# Altium PCB Copy of cs301_YourGroupNumber--4 holes.PcbDoc
Units mm, origin at the board's own origin, x right, y up, seen from the top; angles counter-clockwise.
Board outline 87.88 x 127 mm, 2 copper layers (Top Layer, Bottom Layer); 41 components, 17 nets, 144 pads, 0 vias.
Unrouted connection lines stored in the file: 48.
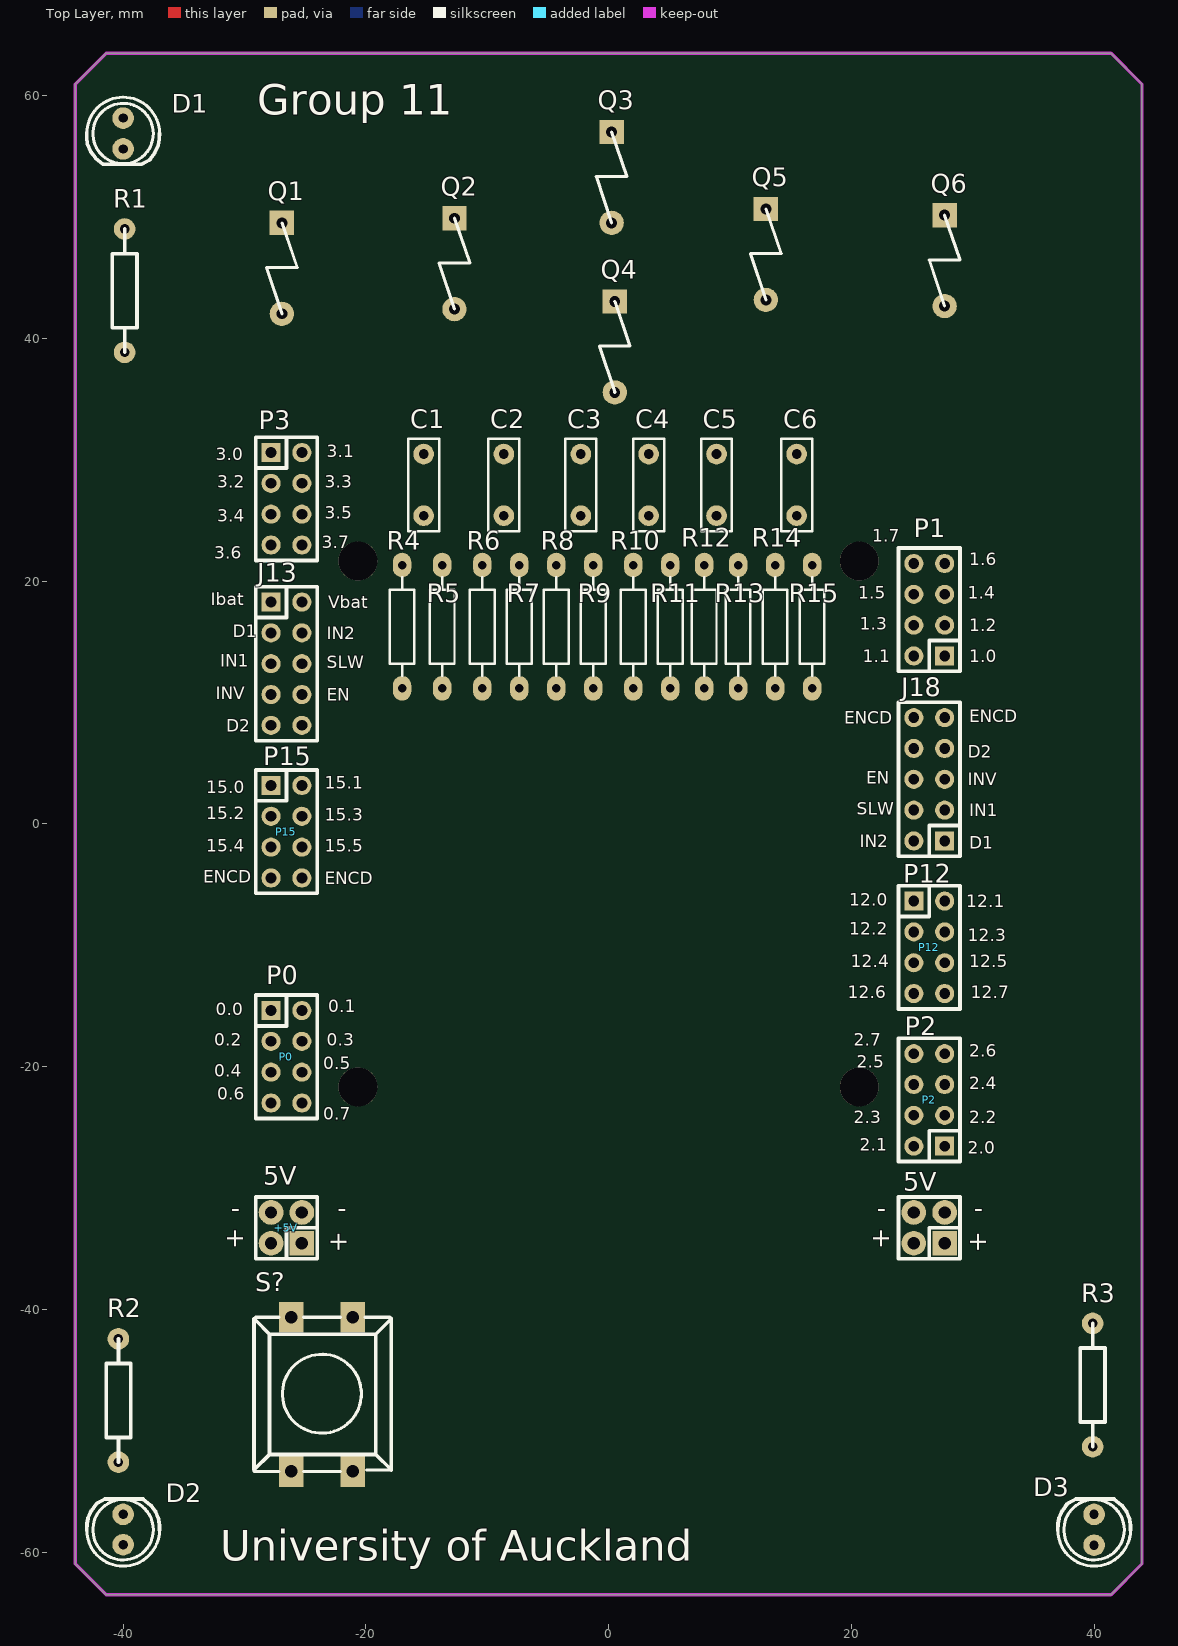
[diagram p0: Top Layer view]
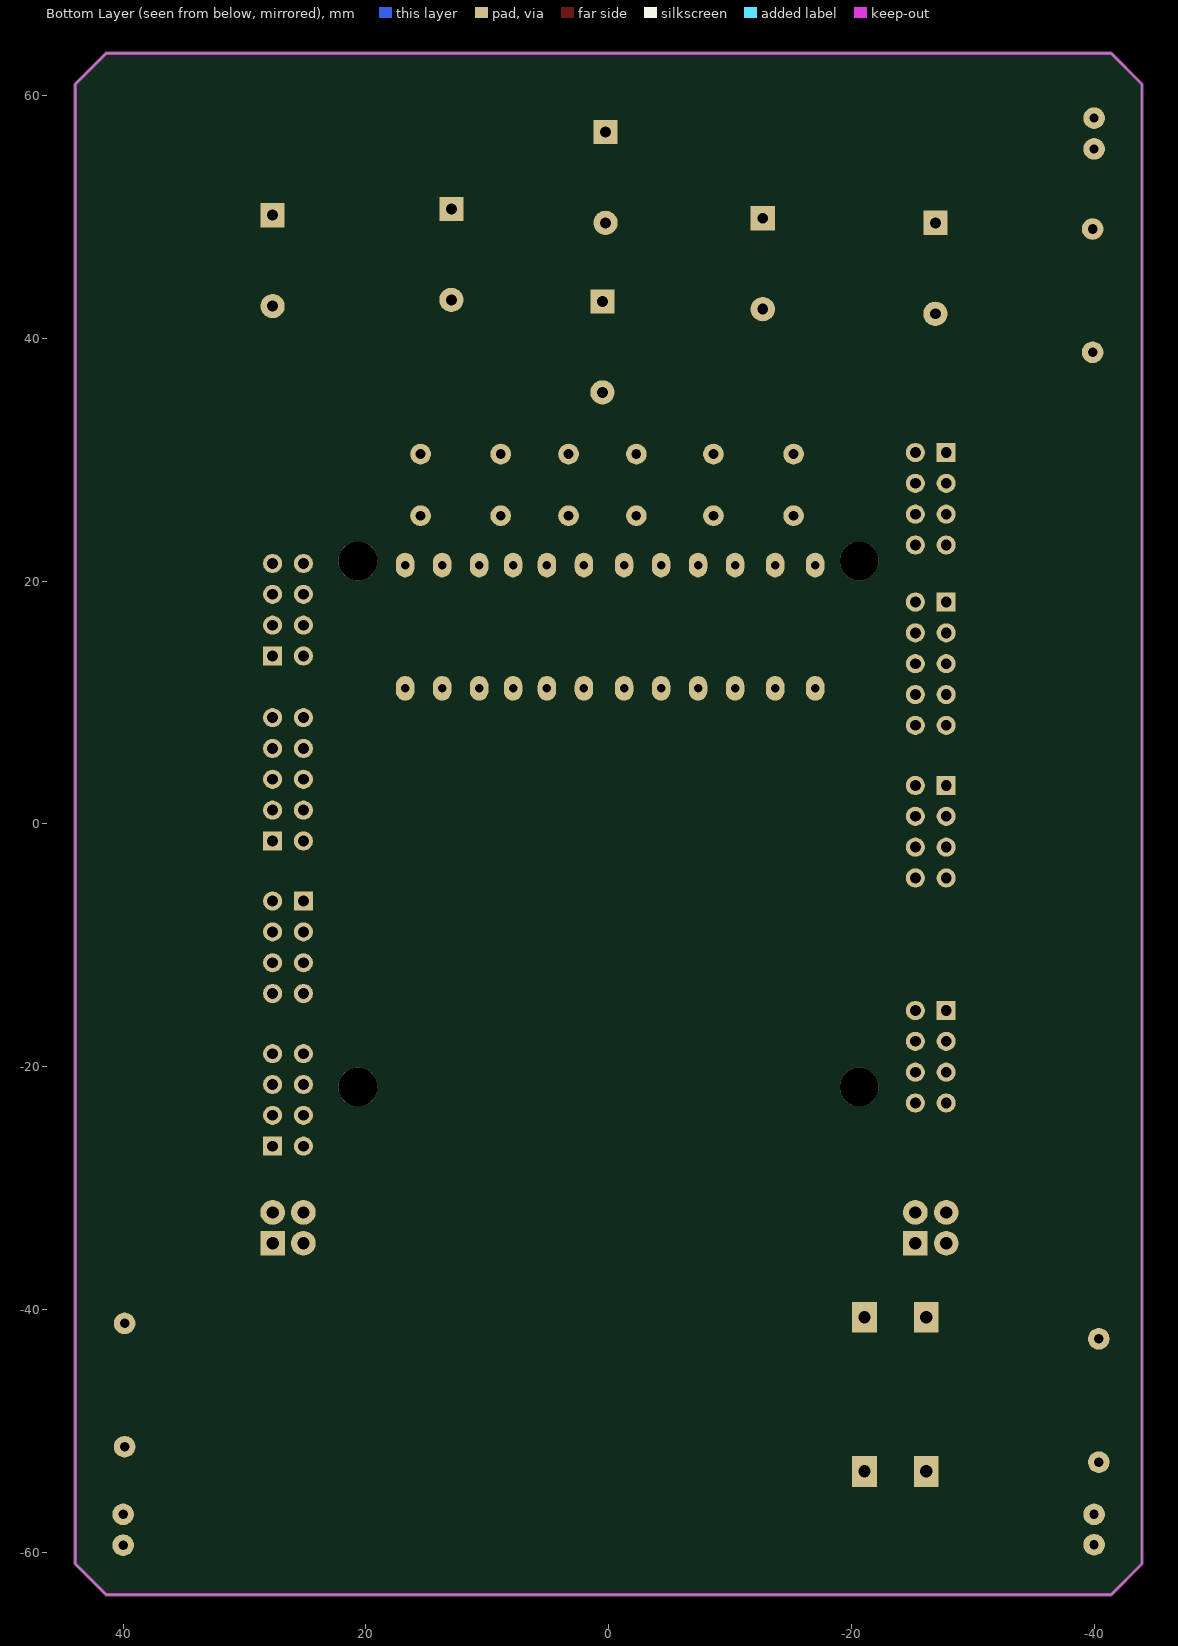
[diagram p1: Bottom Layer view, seen from below]

## Layer stack, top to bottom
Top Solder: solder mask 0.0102, Solder Resist, Dk 3.5
Top Layer: signal copper 0.0356
Dielectric1: dielectric 0.32, FR-4, Dk 4.8
Bottom Layer: signal copper 0.0356
Bottom Solder: solder mask 0.0102, Solder Resist, Dk 3.5

## Board outline
-43.942,-60.96 -41.402,-63.5 41.402,-63.5 43.942,-60.96 43.942,60.96 41.402,63.5 -41.402,63.5 -43.942,60.96

## Design rules (kind name [scope] priority, off if disabled: settings)
Clearance [All] p1: gap=0.254 ignorepadtopadclearanceinfootprint=FALSE except(0: Arc-Hole Track-Hole SMDPad-Hole THPad-Hole Via-Hole Fill-Hole Poly-Hole Region-Hole Text-Hole)
PolygonConnect [All] p1: connectstyle=Relief reliefconductorwidth=0.508 reliefentries=4 polygonreliefangle="90 Angle" airgapwidth=0.254
RoomDefinition cs301_YourGroupNumber--------------- [InComponentClass('cs301_YourGroupNumber---------------')] p1: confinementstyle=ConfineIn formatcopy=TRUE lockcomponents=FALSE outline 171.244,-65.956 182.928,-65.956 182.928,-50.716 171.244,-50.716
RoutingVias [All] p1: holewidth=0.711 width=1.27 viastyle="Through Hole" minholewidth=0.711 minwidth=1.27 maxholewidth=0.711 maxwidth=1.27
SilkToSolderMaskClearance SilkscreenOverComponentPads [IsPad] p1: minsilkscreentomaskgap=0.254 clearancetoexposedcopper=TRUE
SolderMaskExpansion [All] p1: expansion=0.102 istentingtop=FALSE
Width [All] p1: maxlimit=0.762 minlimit=0.254 preferedwidth=0.254 minimp=50.000000 maximp=50.000000 favimp=50.000000
29 further rules are at their usual default settings.

## Components (designator, comment, footprint, x,y, rotation, side; value= is the part's Value field where it differs from the comment)
5V "5V" IDC4 27.686,-34.544 r90 top locked
+5V "5V" IDC4 -25.273,-34.544 r90 top locked
C1 "*" ece-RAD0.2 -15.24,25.4 r90 top
C2 "*" ece-RAD0.2 -8.636,25.4 r90 top
C3 "*" ece-RAD0.2 -2.286,25.4 r90 top
C4 "*" ece-RAD0.2 3.302,25.4 r90 top
C5 "*" ece-RAD0.2 8.89,25.4 r90 top
C6 "*" ece-RAD0.2 15.494,25.4 r90 top
D1 "LED" LED0.1/5MM#1 -40,55.62 r180 top locked
D2 "LED" LED0.1/5MM#2 -40,-56.88 r0 top locked
D3 "LED" LED0.1/5MM#1 40,-56.88 r0 top locked
J13 "CON10" IDC10 -27.813,18.288 r270 top locked
J18 "CON10" IDC10 27.686,-1.397 r90 top locked
P0 "P0" idc8 -27.813,-15.367 r270 top locked
P1 "P1" idc8 27.686,13.843 r90 top locked
P2 "P2" idc8 27.686,-26.543 r90 top locked
P3 "P3" idc8 -27.813,30.607 r270 top locked
P12 "P12" idc8 25.146,-6.35 r270 top locked
P15 "P15" IDC8 -27.813,3.175 r270 top locked
Q1 "VEMT3700" VEMT3700 -30.734,52.07 r270 top
Q2 "VEMT3700" VEMT3700 -16.51,52.451 r270 top
Q3 "VEMT3700" VEMT3700 -3.556,59.563 r270 top
Q4 "VEMT3700" VEMT3700 -3.302,45.593 r270 top
Q5 "VEMT3700" VEMT3700 9.144,53.213 r270 top
Q6 "VEMT3700" VEMT3700 23.876,52.705 r270 top
R1 "RES2" AXIAL0.4 -39.878,49.022 r270 top
R2 "RES2" AXIAL0.4 -40.386,-52.578 r90 top
R3 "RES2" AXIAL0.4 39.878,-41.148 r270 top
R4 "*" ece-AXIAL0.4 -17.018,16.256 r90 top
R5 "*" ece-AXIAL0.4 -13.716,16.256 r270 top
R6 "*" ece-AXIAL0.4 -10.414,16.256 r270 top
R7 "*" ece-AXIAL0.4 -7.366,16.256 r270 top
R8 "*" ece-AXIAL0.4 -4.318,16.256 r270 top
R9 "*" ece-AXIAL0.4 -1.27,16.256 r270 top
R10 "*" ece-AXIAL0.4 2.032,16.256 r270 top
R11 "*" ece-AXIAL0.4 5.08,16.256 r270 top
R12 "*" ece-AXIAL0.4 7.874,16.256 r270 top
R13 "*" ece-AXIAL0.4 10.668,16.256 r270 top
R14 "*" ece-AXIAL0.4 13.716,16.256 r270 top
R15 "*" ece-AXIAL0.4 16.764,16.256 r270 top
S? "SW-PB" SW-PB -26.67,-50.8 r90 top

## Footprints (in the part's own frame and the unit in brackets; to place one, negate y for a bottom-side part, rotate by r counter-clockwise, add the part's x,y. Pads: shape width x height; smd on the part's side, far side on the other; paste and mask are expansions set on the pad)
AXIAL0.4 [mil]
  round 70 hole 31: 1(0,0) 2(400,0)
  silkscreen extent 0,-40 400,40
ece-AXIAL0.4 [mil]
  oval 80x60 hole 27.56: 1(-200,0) 2(200,0)
  silkscreen extent -160,-40 160,40
ece-RAD0.2 [mm]
  round 1.7 hole 0.8: 1(0,0) 2(5.08,0)
  silkscreen extent -1.27,-1.27 6.35,1.27
IDC4 [mil]
  rect 80x80 hole 40: 1(0,0)
  round 80 hole 40: 2(0,100) 3(100,0) 4(100,100)
  silkscreen extent -50,-50 150,150
idc8 [mil]
  rect 62x62 hole 35: 1(0,0)
  round 62 hole 35: 2(0,100) 3(100,0) 4(100,100) 5(200,0) 6(200,100) 7(300,0) 8(300,100)
  silkscreen extent -50,-50 350,150
IDC8 [mil]
  rect 62x62 hole 35: 1(0,0)
  round 62 hole 35: 2(0,100) 3(100,0) 4(100,100) 5(200,0) 6(200,100) 7(300,0) 8(300,100)
  silkscreen extent -50,-50 350,150
IDC10 [mil]
  rect 62x62 hole 35: 1(0,0)
  round 62 hole 35: 2(0,100) 3(100,0) 4(100,100) 5(200,0) 6(200,100) 7(300,0) 8(300,100) 9(400,0) 10(400,100)
  silkscreen extent -50,-50 450,150
LED0.1/5MM#1 [mil]
  round 70 hole 30: A(0,0) K(0,-100)
  silkscreen extent -118,-168 118,50
LED0.1/5MM#2 [mil]
  round 70 hole 30: A(0,0) K(0,-98.43)
  silkscreen extent -118,-168 118,50
SW-PB [mil]
  rect 100x80 hole 40: 1(-100,-20) 1(400,-20) 2(-100,-220) 2(400,-220)
  silkscreen extent -100,-345 400,100
VEMT3700 [mm]
  rect 2x2 hole 0.9: 1(2.54,3.81)
  round 2 hole 0.9: 2(10.033,3.81)
  silkscreen extent 2.54,2.54 10.03,5.08

## Part data
5V +5V: library part CON4, "Connector"
C1 C2 C3 C4 C5 C6: library part CAP, "Capacitor Non Polarised Through Hole"
J13 J18: "Connector"
P0 P1 P2 P3: library part CON8, "Connector"
P12 P15: library part CON8_1, "Connector"
Q1 Q2 Q3 Q4 Q5 Q6: "Silicon NPN Phototransistor"
R4 R5 R6 R7 R8 R9 R10 R11 R12 R13 R14 R15: library part Res1, "Resistor", LatestRevisionDate=17-Jul-2002, LatestRevisionNote="Re-released for DXP Platform.", PackageReference=AXIAL-0.3, Published=8-Jun-2000, Publisher="Altium Limited"
S?: "Push Button Switch"

## Free pads (board coordinates)
  round 3.2 hole 3.2 unplated: 1(-20.65,-21.666) 1(-20.65,21.666) 1(20.65,-21.666) 1(20.65,21.666)

## Nets (pads, with @x,y where several pads share a name; then routed paths per layer and width w, separated by ;. In a path a pad name is that pad's centre, name@x,y a point inside that pad or via, vN(x,y) a via of type N, cw(c..) or ccw(c..) an arc to the next point about the centre after c; other vN are vias at no path point)
+5V: 5V.1 5V.2 +5V.1 +5V.2 R5.2 R7.2 R9.2 R11.2 R13.2 R15.2
GND: 5V.3 5V.4 +5V.3 +5V.4 D1.K D2.K D3.K Q1.1 Q2.1 Q3.1 Q4.1 Q5.1 Q6.1 R4.1 R6.2 R8.2 R10.2 R12.2 R14.2
NetC1_1: C1.1 R4.2 R5.1 | length 0.3
  Top Layer w0.254: R4.2 R4.2@-17.018,21.59
NetC1_2: C1.2 Q1.2
NetC2_1: C2.1 R6.1 R7.1
NetC2_2: C2.2 Q2.2
NetC3_1: C3.1 R8.1 R9.1
NetC3_2: C3.2 Q3.2
NetC4_1: C4.1 R10.1 R11.1
NetC4_2: C4.2 Q4.2
NetC5_1: C5.1 R12.1 R13.1
NetC5_2: C5.2 Q5.2
NetC6_1: C6.1 R14.1 R15.1
NetC6_2: C6.2 Q6.2
NetD1_A: D1.A R1.1
NetD2_A: D2.A R2.1
NetD3_A: D3.A R3.2
pads on no net: J13.1 J13.2 J13.3 J13.4 J13.5 J13.6 J13.7 J13.8 J13.9 J13.10 J18.1 J18.2 J18.3 J18.4 J18.5 J18.6 J18.7 J18.8 J18.9 J18.10 P0.1 P0.2 P0.3 P0.4 P0.5 P0.6 P0.7 P0.8 P1.1 P1.2 P1.3 P1.4 P1.5 P1.6 P1.7 P1.8 P2.1 P2.2 P2.3 P2.4 P2.5 P2.6 P2.7 P2.8 P3.1 P3.2 P3.3 P3.4 P3.5 P3.6 P3.7 P3.8 P12.1 P12.2 P12.3 P12.4 P12.5 P12.6 P12.7 P12.8 P15.1 P15.2 P15.3 P15.4 P15.5 P15.6 P15.7 P15.8 R1.2 R2.2 R3.1 S?.1 S?.2

## Keep-outs
Keep-Out Layer:
  the board outline again, w0.254

## Silkscreen, mask and mechanical layers (free items; w line width, h text height)
Top Overlay:
  text "Group 11" at -28.956,58.42 h2.54
  text "3.1" at -23.241,30.226 h1.02
  text "3.0" at -32.385,29.972 h1.02
  text "3.2" at -32.258,27.686 h1.02
  text "3.3" at -23.368,27.686 h1.02
  text "3.5" at -23.368,25.146 h1.02
  text "3.4" at -32.258,24.892 h1.02
  text "1.7" at 21.717,23.241 h1.02
  text "3.7" at -23.622,22.733 h1.02
  text "3.6" at -32.512,21.844 h1.02
  text "1.6" at 29.718,21.336 h1.02
  text "1.5" at 20.574,18.542 h1.02
  text "1.4" at 29.591,18.542 h1.02
  text "Ibat" at -32.766,18.034 h1.02
  text "Vbat" at -23.114,17.78 h1.02
  text "1.3" at 20.701,16.002 h1.02
  text "1.2" at 29.718,15.875 h1.02
  text "D1" at -30.988,15.367 h1.02
  text "IN2" at -23.241,15.24 h1.02
  text "1.1" at 20.955,13.335 h1.02
  text "1.0" at 29.718,13.335 h1.02
  text "IN1" at -32.004,12.954 h1.02
  text "SLW" at -23.241,12.827 h1.02
  text "INV" at -32.385,10.287 h1.02
  text "EN" at -23.241,10.16 h1.02
  text "ENCD" at 29.718,8.382 h1.02
  text "ENCD" at 19.431,8.255 h1.02
  text "D2" at -31.496,7.62 h1.02
  text "D2" at 29.591,5.461 h1.02
  text "EN" at 21.209,3.302 h1.02
  text "INV" at 29.591,3.175 h1.02
  text "15.1" at -23.368,2.921 h1.02
  text "15.0" at -33.147,2.54 h1.02
  text "SLW" at 20.447,0.762 h1.02
  text "IN1" at 29.718,0.635 h1.02
  text "15.2" at -33.147,0.381 h1.02
  text "15.3" at -23.368,0.254 h1.02
  text "IN2" at 20.701,-1.905 h1.02
  text "D1" at 29.718,-2.032 h1.02
  text "15.4" at -33.147,-2.286 h1.02
  text "15.5" at -23.368,-2.286 h1.02
  text "ENCD" at -33.401,-4.826 h1.02
  text "ENCD" at -23.368,-4.953 h1.02
  text "12.0" at 19.812,-6.731 h1.02
  text "12.1" at 29.464,-6.858 h1.02
  text "12.2" at 19.812,-9.144 h1.02
  text "12.3" at 29.591,-9.652 h1.02
  text "12.4" at 19.939,-11.811 h1.02
  text "12.5" at 29.718,-11.811 h1.02
  text "12.6" at 19.685,-14.351 h1.02
  text "12.7" at 29.845,-14.351 h1.02
  text "0.1" at -23.114,-15.494 h1.02
  text "0.0" at -32.385,-15.748 h1.02
  text "0.2" at -32.512,-18.288 h1.02
  text "0.3" at -23.241,-18.288 h1.02
  text "2.7" at 20.193,-18.288 h1.02
  text "2.6" at 29.718,-19.177 h1.02
  text "2.5" at 20.447,-20.066 h1.02
  text "0.5" at -23.495,-20.193 h1.02
  text "0.4" at -32.512,-20.828 h1.02
  text "2.4" at 29.718,-21.844 h1.02
  text "0.6" at -32.258,-22.733 h1.02
  text "0.7" at -23.495,-24.384 h1.02
  text "2.3" at 20.193,-24.638 h1.02
  text "2.2" at 29.718,-24.638 h1.02
  text "2.1" at 20.701,-26.924 h1.02
  text "2.0" at 29.591,-27.178 h1.02
  text "-" at -30.353,-31.242 h1.52 r180
  text "-" at -21.59,-31.242 h1.52 r180
  text "-" at 22.86,-31.242 h1.52 r180
  text "-" at 30.861,-31.242 h1.52 r180
  text "+" at -30.099,-35.052 h1.52 r90
  text "+" at 23.114,-35.052 h1.52 r90
  text "+" at -21.59,-35.306 h1.52 r90
  text "+" at 31.115,-35.306 h1.52 r90
  text "University of Auckland" at -32.004,-60.706 h2.54